# Altium PCB PCB1.PcbDoc
Units mil, origin at the board's own origin, x right, y up, seen from the top; angles counter-clockwise.
Board outline 3125 x 1335 mil, 2 copper layers (Top Layer, Bottom Layer); 14 components, 5 nets, 29 pads, 1353 vias.
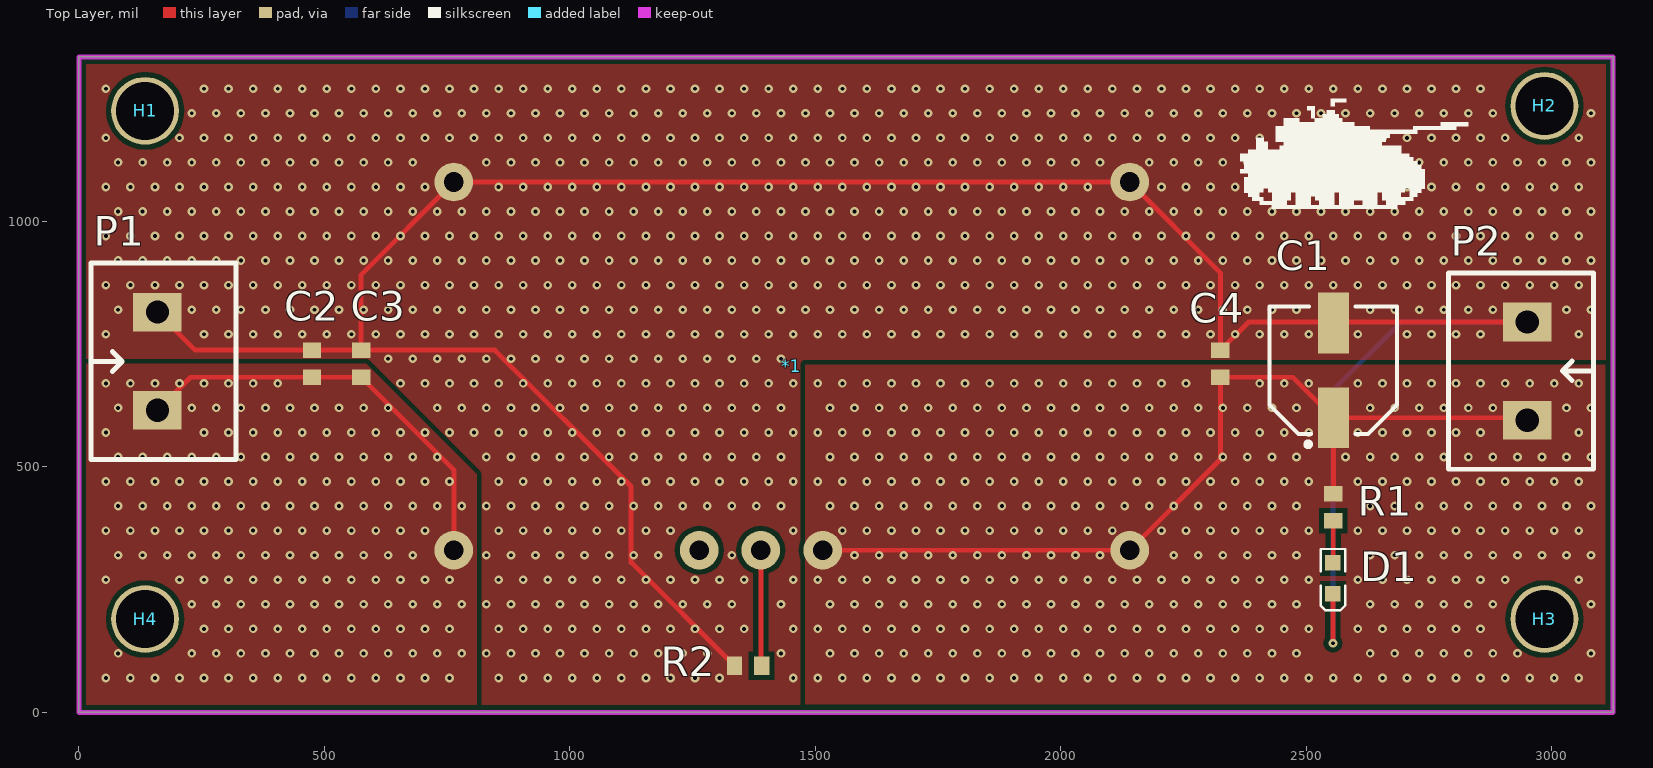
[diagram p0: Top Layer view]
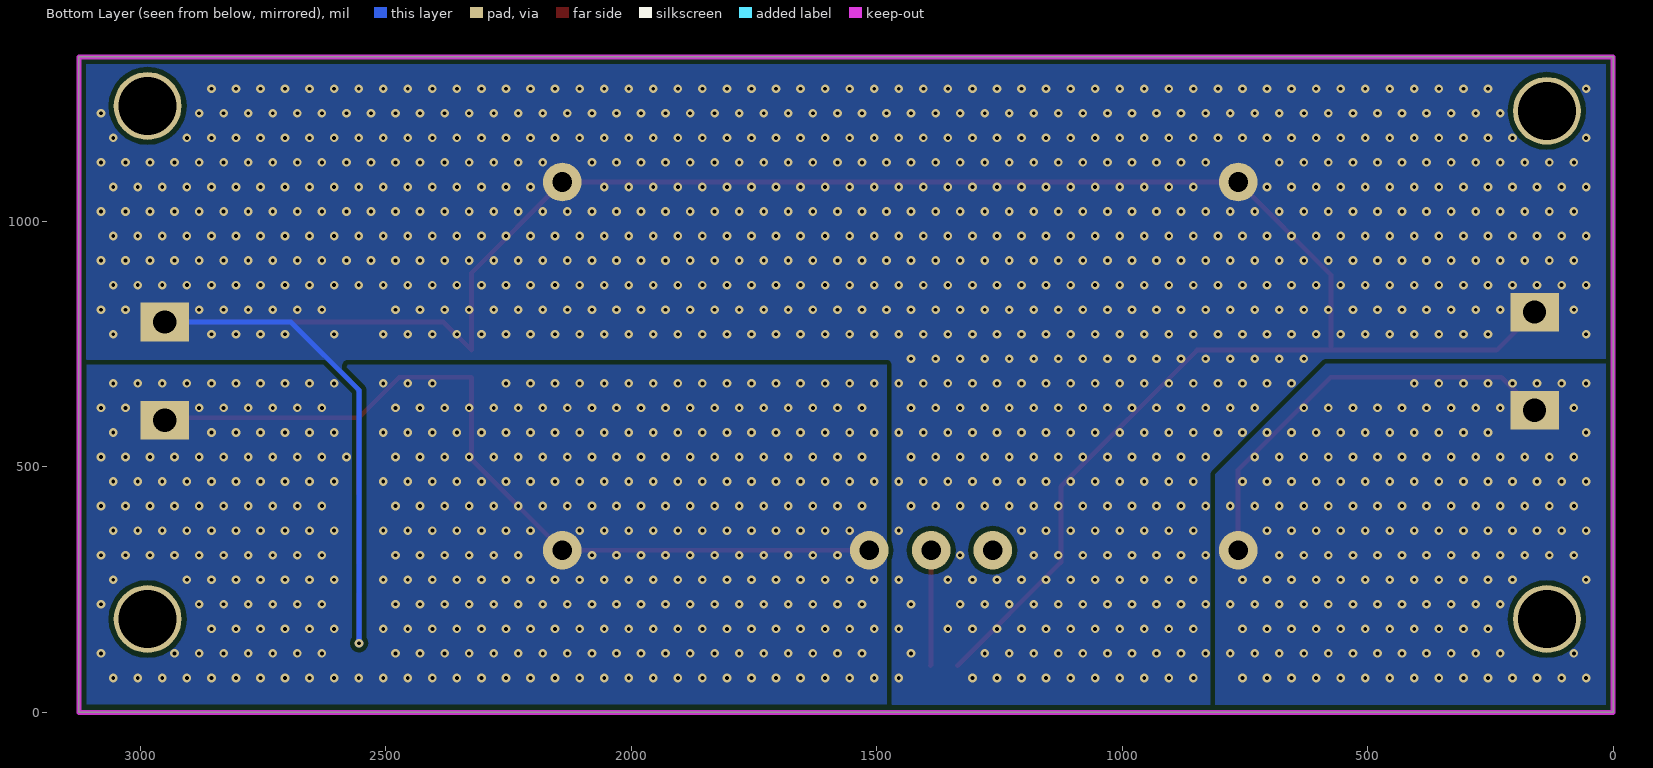
[diagram p1: Bottom Layer view, seen from below]
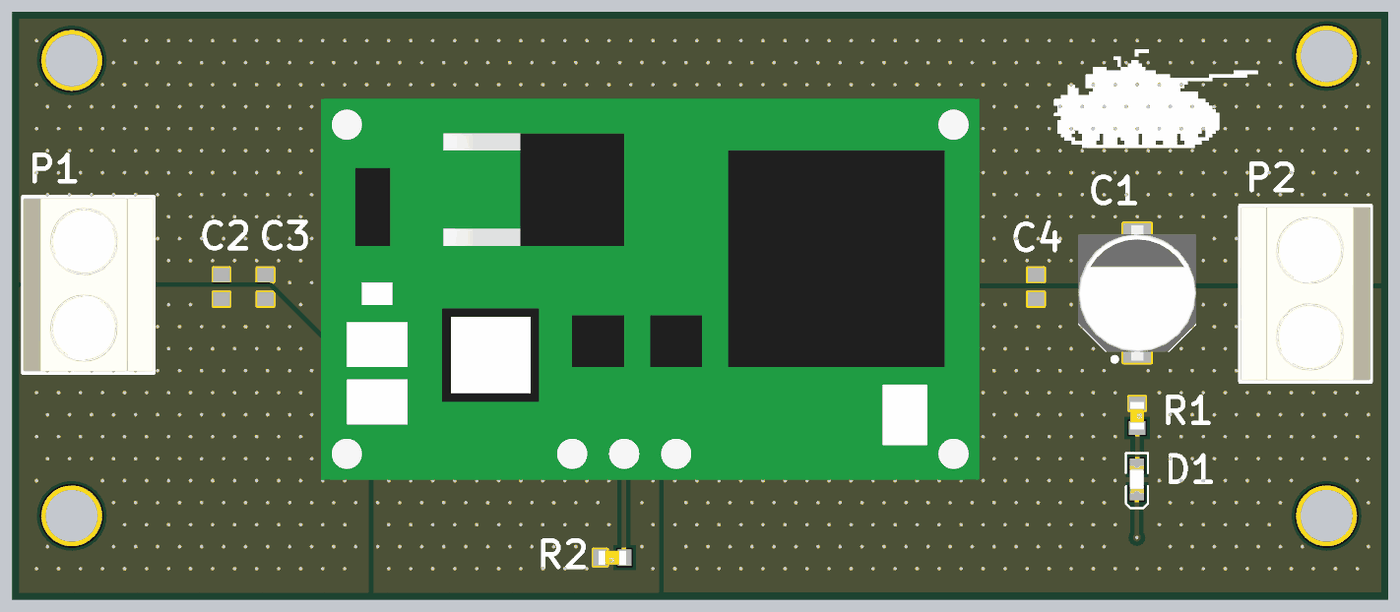
[diagram p2: 3D render of the assembled board from above, using the file's embedded part models]

## Layer stack, top to bottom
Top Solder: solder mask 0.4, Solder Resist, Dk 3.5
Top Layer: signal copper 1.4
Dielectric 1: dielectric 12.6, FR-4, Dk 4.8
Bottom Layer: signal copper 1.4
Bottom Solder: solder mask 0.4, Solder Resist, Dk 3.5

## Board outline
0,0 0,1335 3125,1335 3125,0

## Design rules (kind name [scope] priority, off if disabled: settings)
Clearance [All] p1: gap=10 ignorepadtopadclearanceinfootprint=FALSE except(0: Arc-Hole Track-Hole SMDPad-Hole THPad-Hole Via-Hole Fill-Hole Poly-Hole Region-Hole Text-Hole)
PolygonConnect PolygonConnect_2 [InNet('GND') vs InNet('GND')] p1: connectstyle=Direct reliefconductorwidth=10 reliefentries=4 polygonreliefangle="90 Angle" airgapwidth=10
PolygonConnect PolygonConnect_1 [InNet('Net*1_5') vs InNet('Net*1_5')] p2: connectstyle=Direct reliefconductorwidth=10 reliefentries=4 polygonreliefangle="90 Angle" airgapwidth=10
PolygonConnect [InNet('Net*1_2') vs InNet('Net*1_2')] p3: connectstyle=Direct reliefconductorwidth=10 reliefentries=4 polygonreliefangle="90 Angle" airgapwidth=10
RoutingVias [All] p1: holewidth=28 width=50 viastyle="Through Hole" minholewidth=7.87 minwidth=17.72 maxholewidth=28 maxwidth=50
SolderMaskExpansion [All] p1: expansion=4
Width [All] p1: maxlimit=10 minlimit=10 preferedwidth=10
30 further rules are at their usual default settings.

## Classes and differential pairs
component class Sheet1: *1 C1 C2 C3 C4 D1 H1 H2 H3 H4 P1 P2 R2

## Components (designator, comment, footprint, x,y, rotation, side; value= is the part's Value field where it differs from the comment)
*1 "PTN78020" PTN78020H 763.82,330 r0 top
C1 "Cap Pol SMD" "CAP ALU SIZE D" 2555,696.46 r90 top value=220uF
C2 "Cap Non-Pol SMD" CAP-SM-0603 475,710 r270 top value=1uF
C3 "Cap Non-Pol SMD" CAP-SM-0603 575,710 r270 top value=2.2uF
C4 "Cap Non-Pol SMD" CAP-SM-0603 2325,710 r270 top value=1uF
D1 "LED SMD" LED_0603_Blue 2554.25,272.63 r270 top
H1 "Hole" "LO KHOAN 3MM" 135,1225 r0 top
H2 "Hole" "LO KHOAN 3MM" 2985,1235 r0 top
H3 "Hole" "LO KHOAN 3MM" 2985,190 r0 top
H4 "Hole" "LO KHOAN 3MM" 135,190 r0 top
P1 "Domino 2" "DOMINO 2- 5mm" 160,715 r90 top
P2 "Domino 2" "DOMINO 2- 5mm" 2950,695 r270 top
R1 "RESISTOR SMD" RES-SM-0603 2554.8,444.69 r270 top value=10K
R2 "RESISTOR SMD" RES-SM-0603 1390,95 r180 top value=20K

## Footprints (in the part's own frame and the unit in brackets; to place one, negate y for a bottom-side part, rotate by r counter-clockwise, add the part's x,y. Pads: shape width x height; smd on the part's side, far side on the other; paste and mask are expansions set on the pad)
"CAP ALU SIZE D" [mm] "Capacitor, Aluminium Electrolytric, 6.6mm L X 6.6mm W X 5.4mm H, IPC Medium Density"
  rect 3.15x1.6 smd: 1(-2.45,0) 2(2.45,0)
  silkscreen extent -3.95,-3.3 3.3,3.3, body extent -3.9,-3.4 3.9,3.4, height 5.7
CAP-SM-0603 [mm] "SMD Ceramic Capacitor Size 0603"
  rect 0.8x0.95 smd: 1(-0.7,0) 2(0.7,0)
  body extent -0.85,-0.45 0.85,0.45, height 0.6
"DOMINO 2- 5mm" [mm]
  rect 2x2.5 hole 1.2: 1(-2.54,0) 2(2.54,0)
  silkscreen extent -5.08,-4.08 5.08,3.43, body extent -5,-4.07 5,3.43, height 10
LED_0603_Blue [mm] "Chip LED, 2-Leads, Body 1.6x0.8mm, IPC Medium Density"
  rect 0.8x0.8 smd: 1(-0.8,0) 2(0.8,0)
  silkscreen extent -1.52,-0.64 1.65,0.64, body extent -0.8,-0.4 0.8,0.4, height 0.7
"LO KHOAN 3MM" [mil]
  round 138 hole 118.1: 1(0,0)
PTN78020H [mm]
  round 2 hole 1.02: 1(0,19.05) 2(0,0) 3(12.7,0) 4(15.88,0) 5(19.08,0) 6(34.96,0) 7(34.96,19.05)
  body extent -1.6,-1.48 36.4,20.53, height 7.4
RES-SM-0603 [mm]
  rect 0.8x0.95 smd: 1(-0.014,0) 2(1.386,0)
  body extent -0.11,-0.4 1.49,0.4, height 0.3

## Part data
C1: "Polarized Capacitor (Radial)"
C2 C3 C4: "Capacitor"
D1: "LED"
H1 H2 H3 H4: "Hole 3mm"
P1 P2: "Domino, 2-Pin", LatestRevisionDate=17-Jul-2002, LatestRevisionNote="Re-released for DXP Platform.", Publisher="Altium Limited"
R1 R2: "Resistor"

## Via types
v1: diameter 17.72, hole 7.87, Top Layer to Bottom Layer, tented both sides, 1353 vias

## Nets (pads, with @x,y where several pads share a name; then routed paths per layer and width w, separated by ;. In a path a pad name is that pad's centre, name@x,y a point inside that pad or via, vN(x,y) a via of type N, cw(c..) or ccw(c..) an arc to the next point about the centre after c; other vN are vias at no path point)
GND: *1.1 *1.7 C1.2 C2.1 C3.1 C4.1 D1.2 P1.2 P2.1 R2.2 | length 5498.2
  Top Layer w10: P1.2 237.44,737.56 C2.1 C3.1 ; R2.2 1125,305.44 1125,460 847.44,737.56 C3.1 ; v1(2554.25,140.64) D1.2 ; P2.1 2382.44,795 C4.1 2325,895.2 *1.7 *1.1 575,891.18 C3.1
  Bottom Layer w10: v1(2554.25,140.64) 2554.25,656.06 2693.19,795 P2.1
  other v1: 855,70 905,70 955,70 1005,70 1055,70 1105,70 1155,70 1205,70 1255,70 1305,70 1455,70 830,120 880,120 930,120 980,120 1030,120 1080,120 1130,120 1180,120 1230,120 1280,120 1430,120 855,170 905,170 955,170 1005,170 1055,170 1105,170 1155,170 1205,170 1255,170 1305,170 1355,170 1455,170 830,220 880,220 930,220 980,220 1030,220 1080,220 1130,220 1180,220 1230,220 1280,220 1330,220 1430,220 855,270 905,270 955,270 1005,270 1055,270 1105,270 1155,270 1205,270 1255,270 1305,270 1355,270 1455,270 830,320 880,320 930,320 980,320 1030,320 1080,320 1130,320 1180,320 1330,320 855,370 905,370 955,370 1005,370 1055,370 1105,370 1155,370 1205,370 1455,370 830,420 880,420 930,420 980,420 1030,420 1080,420 1130,420 1180,420 1230,420 1280,420 1330,420 1380,420 1430,420 855,470 905,470 955,470 1005,470 1055,470 1105,470 1155,470 1205,470 1255,470 1305,470 1355,470 1405,470 1455,470 830,520 880,520 930,520 980,520 1030,520 1080,520 1130,520 1180,520 1230,520 1280,520 1330,520 1380,520 1430,520 755,570 805,570 855,570 905,570 955,570 1005,570 1055,570 1105,570 1155,570 1205,570 1255,570 1305,570 1355,570 1405,570 1455,570 730,620 780,620 830,620 880,620 930,620 980,620 1030,620 1080,620 1130,620 1180,620 1230,620 1280,620 1330,620 1380,620 1430,620 655,670 705,670 755,670 805,670 855,670 905,670 955,670 1005,670 1055,670 1105,670 1155,670 1205,670 1255,670 1305,670 1355,670 1405,670 1455,670 630,720 680,720 730,720 780,720 830,720 880,720 930,720 980,720 1030,720 1080,720 1130,720 1180,720 1230,720 1280,720 1330,720 1380,720 1430,720 55,770 255,770 305,770 355,770 405,770 455,770 505,770 555,770 605,770 655,770 705,770 755,770 805,770 855,770 905,770 955,770 1005,770 1055,770 1105,770 1155,770 1205,770 1255,770 1305,770 1355,770 1405,770 1455,770 1505,770 1555,770 1605,770 1655,770 1705,770 1755,770 1805,770 1855,770 1905,770 1955,770 2005,770 2055,770 2105,770 2155,770 2205,770 2255,770 2305,770 2355,770 2405,770 2455,770 2505,770 2605,770 2705,770 2755,770 2805,770 2855,770 3055,770 80,820 230,820 280,820 330,820 380,820 430,820 480,820 530,820 580,820 630,820 680,820 730,820 780,820 830,820 880,820 930,820 980,820 1030,820 1080,820 1130,820 1180,820 1230,820 1280,820 1330,820 1380,820 1430,820 1480,820 1530,820 1580,820 1630,820 1680,820 1730,820 1780,820 1830,820 1880,820 1930,820 1980,820 2030,820 2080,820 2130,820 2180,820 2230,820 2280,820 2330,820 2380,820 2430,820 2480,820 2630,820 2680,820 2730,820 2780,820 2830,820 2880,820 3030,820 3080,820 55,870 105,870 155,870 205,870 255,870 305,870 355,870 405,870 455,870 505,870 555,870 605,870 655,870 705,870 755,870 805,870 855,870 905,870 955,870 1005,870 1055,870 1105,870 1155,870 1205,870 1255,870 1305,870 1355,870 1405,870 1455,870 1505,870 1555,870 1605,870 1655,870 1705,870 1755,870 1805,870 1855,870 1905,870 1955,870 2005,870 2055,870 2105,870 2155,870 2205,870 2255,870 2305,870 2355,870 2405,870 2455,870 2505,870 2555,870 2605,870 2655,870 2705,870 2755,870 2805,870 2855,870 2905,870 2955,870 3005,870 3055,870 80,920 130,920 180,920 230,920 280,920 330,920 380,920 430,920 480,920 530,920 580,920 630,920 680,920 730,920 780,920 830,920 880,920 930,920 980,920 1030,920 1080,920 1130,920 1180,920 1230,920 1280,920 1330,920 1380,920 1430,920 1480,920 1530,920 1580,920 1630,920 1680,920 1730,920 1780,920 1830,920 1880,920 1930,920 1980,920 2030,920 2080,920 2130,920 2180,920 2230,920 2280,920 2330,920 2380,920 2430,920 2480,920 2530,920 2580,920 2630,920 2680,920 2730,920 2780,920 2830,920 2880,920 2930,920 2980,920 3030,920 3080,920 55,970 105,970 155,970 205,970 255,970 305,970 355,970 405,970 455,970 505,970 555,970 605,970 655,970 705,970 755,970 805,970 855,970 905,970 955,970 1005,970 1055,970 1105,970 1155,970 1205,970 1255,970 1305,970 1355,970 1405,970 1455,970 1505,970 1555,970 1605,970 1655,970 1705,970 1755,970 1805,970 1855,970 1905,970 1955,970 2005,970 2055,970 2105,970 2155,970 2205,970 2255,970 2305,970 2355,970 2405,970 2455,970 2505,970 2555,970 2605,970 2655,970 2705,970 2755,970 2805,970 2855,970 2905,970 2955,970 3005,970 3055,970 80,1020 130,1020 180,1020 230,1020 280,1020 330,1020 380,1020 430,1020 480,1020 530,1020 580,1020 630,1020 680,1020 730,1020 780,1020 830,1020 880,1020 930,1020 980,1020 1030,1020 1080,1020 1130,1020 1180,1020 1230,1020 1280,1020 1330,1020 1380,1020 1430,1020 1480,1020 1530,1020 1580,1020 1630,1020 1680,1020 1730,1020 1780,1020 1830,1020 1880,1020 1930,1020 1980,1020 2030,1020 2080,1020 2130,1020 2180,1020 2230,1020 2280,1020 2330,1020 2380,1020 2430,1020 2480,1020 2530,1020 2580,1020 2630,1020 2680,1020 2730,1020 2780,1020 2830,1020 2880,1020 2930,1020 2980,1020 3030,1020 3080,1020 55,1070 105,1070 155,1070 205,1070 255,1070 305,1070 355,1070 405,1070 455,1070 505,1070 555,1070 605,1070 655,1070 705,1070 855,1070 905,1070 955,1070 1005,1070 1055,1070 1105,1070 1155,1070 1205,1070 1255,1070 1305,1070 1355,1070 1405,1070 1455,1070 1505,1070 1555,1070 1605,1070 1655,1070 1705,1070 1755,1070 1805,1070 1855,1070 1905,1070 1955,1070 2005,1070 2055,1070 2205,1070 2255,1070 2305,1070 2355,1070 2405,1070 2455,1070 2505,1070 2555,1070 2605,1070 2655,1070 2705,1070 2755,1070 2805,1070 2855,1070 2905,1070 2955,1070 3005,1070 3055,1070 80,1120 130,1120 180,1120 230,1120 280,1120 330,1120 380,1120 430,1120 480,1120 530,1120 580,1120 630,1120 680,1120 830,1120 880,1120 930,1120 980,1120 1030,1120 1080,1120 1130,1120 1180,1120 1230,1120 1280,1120 1330,1120 1380,1120 1430,1120 1480,1120 1530,1120 1580,1120 1630,1120 1680,1120 1730,1120 1780,1120 1830,1120 1880,1120 1930,1120 1980,1120 2030,1120 2080,1120 2180,1120 2230,1120 2280,1120 2330,1120 2380,1120 2430,1120 2480,1120 2530,1120 2580,1120 2630,1120 2680,1120 2730,1120 2780,1120 2830,1120 2880,1120 2930,1120 2980,1120 3030,1120 3080,1120 55,1170 205,1170 255,1170 305,1170 355,1170 405,1170 455,1170 505,1170 555,1170 605,1170 655,1170 705,1170 755,1170 805,1170 855,1170 905,1170 955,1170 1005,1170 1055,1170 1105,1170 1155,1170 1205,1170 1255,1170 1305,1170 1355,1170 1405,1170 1455,1170 1505,1170 1555,1170 1605,1170 1655,1170 1705,1170 1755,1170 1805,1170 1855,1170 1905,1170 1955,1170 2005,1170 2055,1170 2105,1170 2155,1170 2205,1170 2255,1170 2305,1170 2355,1170 2405,1170 2455,1170 2505,1170 2555,1170 2605,1170 2655,1170 2705,1170 2755,1170 2805,1170 2855,1170 2905,1170 3055,1170 230,1220 280,1220 330,1220 380,1220 430,1220 480,1220 530,1220 580,1220 630,1220 680,1220 730,1220 780,1220 830,1220 880,1220 930,1220 980,1220 1030,1220 1080,1220 1130,1220 1180,1220 1230,1220 1280,1220 1330,1220 1380,1220 1430,1220 1480,1220 1530,1220 1580,1220 1630,1220 1680,1220 1730,1220 1780,1220 1830,1220 1880,1220 1930,1220 1980,1220 2030,1220 2080,1220 2130,1220 2180,1220 2230,1220 2280,1220 2330,1220 2380,1220 2430,1220 2480,1220 2530,1220 2580,1220 2630,1220 2680,1220 2730,1220 2780,1220 2830,1220 2880,1220 3080,1220 55,1270 255,1270 305,1270 355,1270 405,1270 455,1270 505,1270 555,1270 605,1270 655,1270 705,1270 755,1270 805,1270 855,1270 905,1270 955,1270 1005,1270 1055,1270 1105,1270 1155,1270 1205,1270 1255,1270 1305,1270 1355,1270 1405,1270 1455,1270 1505,1270 1555,1270 1605,1270 1655,1270 1705,1270 1755,1270 1805,1270 1855,1270 1905,1270 1955,1270 2005,1270 2055,1270 2105,1270 2155,1270 2205,1270 2255,1270 2305,1270 2355,1270 2405,1270 2455,1270 2505,1270 2555,1270 2605,1270 2655,1270 2705,1270 2755,1270 2805,1270 2855,1270
Net*1_2: *1.2 C2.2 C3.2 P1.1 | length 873.6
  Top Layer w10: P1.1 227.44,682.44 C2.2 C3.2 763.82,493.62 *1.2
  other v1: 55,70 105,70 155,70 205,70 255,70 305,70 355,70 405,70 455,70 505,70 555,70 605,70 655,70 705,70 755,70 80,120 230,120 280,120 330,120 380,120 430,120 480,120 530,120 580,120 630,120 680,120 730,120 780,120 255,170 305,170 355,170 405,170 455,170 505,170 555,170 605,170 655,170 705,170 755,170 230,220 280,220 330,220 380,220 430,220 480,220 530,220 580,220 630,220 680,220 730,220 780,220 55,270 205,270 255,270 305,270 355,270 405,270 455,270 505,270 555,270 605,270 655,270 705,270 755,270 80,320 130,320 180,320 230,320 280,320 330,320 380,320 430,320 480,320 530,320 580,320 630,320 680,320 55,370 105,370 155,370 205,370 255,370 305,370 355,370 405,370 455,370 505,370 555,370 605,370 655,370 705,370 80,420 130,420 180,420 230,420 280,420 330,420 380,420 430,420 480,420 530,420 580,420 630,420 680,420 730,420 780,420 55,470 105,470 155,470 205,470 255,470 305,470 355,470 405,470 455,470 505,470 555,470 605,470 655,470 705,470 755,470 80,520 130,520 180,520 230,520 280,520 330,520 380,520 430,520 480,520 530,520 580,520 630,520 680,520 730,520 55,570 255,570 305,570 355,570 405,570 455,570 505,570 555,570 605,570 655,570 705,570 80,620 230,620 280,620 330,620 380,620 430,620 480,620 530,620 580,620 630,620 55,670 105,670 155,670 205,670 255,670 305,670 355,670 405,670
Net*1_4: *1.4 R2.1 | length 235.6
  Top Layer w10: *1.4 1389.02,96.54 R2.1
Net*1_5: *1.5 *1.6 C1.1 C4.2 P2.2 R1.1 | length 1870.2
  Top Layer w10: *1.5 *1.6 2325,514.8 C4.2 2472.56,682.44 C1.1 ; R1.1 2555,445.45 C1.1 ; P2.2 2945,600 C1.1
  other v1: 1505,70 1555,70 1605,70 1655,70 1705,70 1755,70 1805,70 1855,70 1905,70 1955,70 2005,70 2055,70 2105,70 2155,70 2205,70 2255,70 2305,70 2355,70 2405,70 2455,70 2505,70 2555,70 2605,70 2655,70 2705,70 2755,70 2805,70 2855,70 2905,70 2955,70 3005,70 3055,70 1530,120 1580,120 1630,120 1680,120 1730,120 1780,120 1830,120 1880,120 1930,120 1980,120 2030,120 2080,120 2130,120 2180,120 2230,120 2280,120 2330,120 2380,120 2430,120 2480,120 2630,120 2680,120 2730,120 2780,120 2830,120 2880,120 2930,120 3080,120 1505,170 1555,170 1605,170 1655,170 1705,170 1755,170 1805,170 1855,170 1905,170 1955,170 2005,170 2055,170 2105,170 2155,170 2205,170 2255,170 2305,170 2355,170 2405,170 2455,170 2505,170 2605,170 2655,170 2705,170 2755,170 2805,170 2855,170 1530,220 1580,220 1630,220 1680,220 1730,220 1780,220 1830,220 1880,220 1930,220 1980,220 2030,220 2080,220 2130,220 2180,220 2230,220 2280,220 2330,220 2380,220 2430,220 2480,220 2630,220 2680,220 2730,220 2780,220 2830,220 2880,220 3080,220 1505,270 1555,270 1605,270 1655,270 1705,270 1755,270 1805,270 1855,270 1905,270 1955,270 2005,270 2055,270 2105,270 2155,270 2205,270 2255,270 2305,270 2355,270 2405,270 2455,270 2505,270 2605,270 2655,270 2705,270 2755,270 2805,270 2855,270 2905,270 3055,270 1580,320 1630,320 1680,320 1730,320 1780,320 1830,320 1880,320 1930,320 1980,320 2030,320 2080,320 2230,320 2280,320 2330,320 2380,320 2430,320 2480,320 2630,320 2680,320 2730,320 2780,320 2830,320 2880,320 2930,320 2980,320 3030,320 3080,320 1555,370 1605,370 1655,370 1705,370 1755,370 1805,370 1855,370 1905,370 1955,370 2005,370 2055,370 2105,370 2205,370 2255,370 2305,370 2355,370 2405,370 2455,370 2505,370 2605,370 2655,370 2705,370 2755,370 2805,370 2855,370 2905,370 2955,370 3005,370 3055,370 1530,420 1580,420 1630,420 1680,420 1730,420 1780,420 1830,420 1880,420 1930,420 1980,420 2030,420 2080,420 2130,420 2180,420 2230,420 2280,420 2330,420 2380,420 2430,420 2480,420 2630,420 2680,420 2730,420 2780,420 2830,420 2880,420 2930,420 2980,420 3030,420 3080,420 1505,470 1555,470 1605,470 1655,470 1705,470 1755,470 1805,470 1855,470 1905,470 1955,470 2005,470 2055,470 2105,470 2155,470 2205,470 2255,470 2305,470 2355,470 2405,470 2455,470 2505,470 2605,470 2655,470 2705,470 2755,470 2805,470 2855,470 2905,470 2955,470 3005,470 3055,470 1530,520 1580,520 1630,520 1680,520 1730,520 1780,520 1830,520 1880,520 1930,520 1980,520 2030,520 2080,520 2130,520 2180,520 2230,520 2280,520 2330,520 2380,520 2430,520 2480,520 2580,520 2630,520 2680,520 2730,520 2780,520 2830,520 2880,520 2930,520 2980,520 3030,520 3080,520 1505,570 1555,570 1605,570 1655,570 1705,570 1755,570 1805,570 1855,570 1905,570 1955,570 2005,570 2055,570 2105,570 2155,570 2205,570 2255,570 2305,570 2355,570 2405,570 2455,570 2505,570 2605,570 2655,570 2705,570 2755,570 2805,570 2855,570 3055,570 1530,620 1580,620 1630,620 1680,620 1730,620 1780,620 1830,620 1880,620 1930,620 1980,620 2030,620 2080,620 2130,620 2180,620 2230,620 2280,620 2330,620 2380,620 2430,620 2480,620 2630,620 2680,620 2730,620 2780,620 2830,620 2880,620 3030,620 3080,620 1505,670 1555,670 1605,670 1655,670 1705,670 1755,670 1805,670 1855,670 1905,670 1955,670 2005,670 2055,670 2105,670 2155,670 2205,670 2255,670 2405,670 2455,670 2505,670 2605,670 2655,670 2705,670 2755,670 2805,670 2855,670 2905,670 2955,670 3005,670 3055,670
NetD1_1: D1.1 R1.2 | length 86.2
  Top Layer w10: D1.1 2554.8,304.68 R1.2
pads on no net: *1.3 H1.1 H2.1 H3.1 H4.1

## Polygon pours and split planes (outlines as drawn)
GND on Top Layer "GND_L01_P004" (solid, remove dead copper, pour order 4): 0,0 3125,0 3125,1335 0,1335
Net*1_5 on Top Layer "NET*1_5_L01_P002" (solid, remove dead copper, pour order 2): 1479.61,707.69 3108.79,707.69 3108.79,16.19 1479.61,16.19
Net*1_2 on Top Layer "NET*1_2_L01_P000" (solid, remove dead copper, pour order 0): 585,710 810,485 810,10 10,10 10,710
GND on Bottom Layer "GND_L02_P012" (solid, remove dead copper, pour order 12): 0,0 0,1335 3125,1335 3125,0
Net*1_5 on Bottom Layer "NET*1_5_L02_P010" (solid, remove dead copper, pour order 10): 1479.62,707.7 3108.8,707.7 3108.8,16.2 1479.62,16.2
Net*1_2 on Bottom Layer "NET*1_2_L02_P008" (solid, remove dead copper, pour order 8): 585.02,710.03 810.02,485.03 810.02,10.03 10.02,10.03 10.02,710.03

## Keep-outs
Keep-Out Layer:
  the board outline again, w10

## Silkscreen, mask and mechanical layers (free items; w line width, h text height)
Top Overlay:
  region: 97 vertices and 7 holes, not listed, extent 2365.64,1026.07 2829.64,1234.07
  region: 2581.64,1242.07 2557.64,1242.07 2557.64,1234.07 2549.64,1234.07 2549.64,1250.07 2581.64,1250.07